# Altium PCB PCBv2.PcbDoc
Units mm, origin at the board's own origin, x right, y up, seen from the top; angles counter-clockwise.
Board outline 94 x 133.2 mm, 2 copper layers (Top Layer, Bottom Layer); 118 components, 108 nets, 537 pads, 13 vias.
Unrouted connection lines stored in the file: 303.
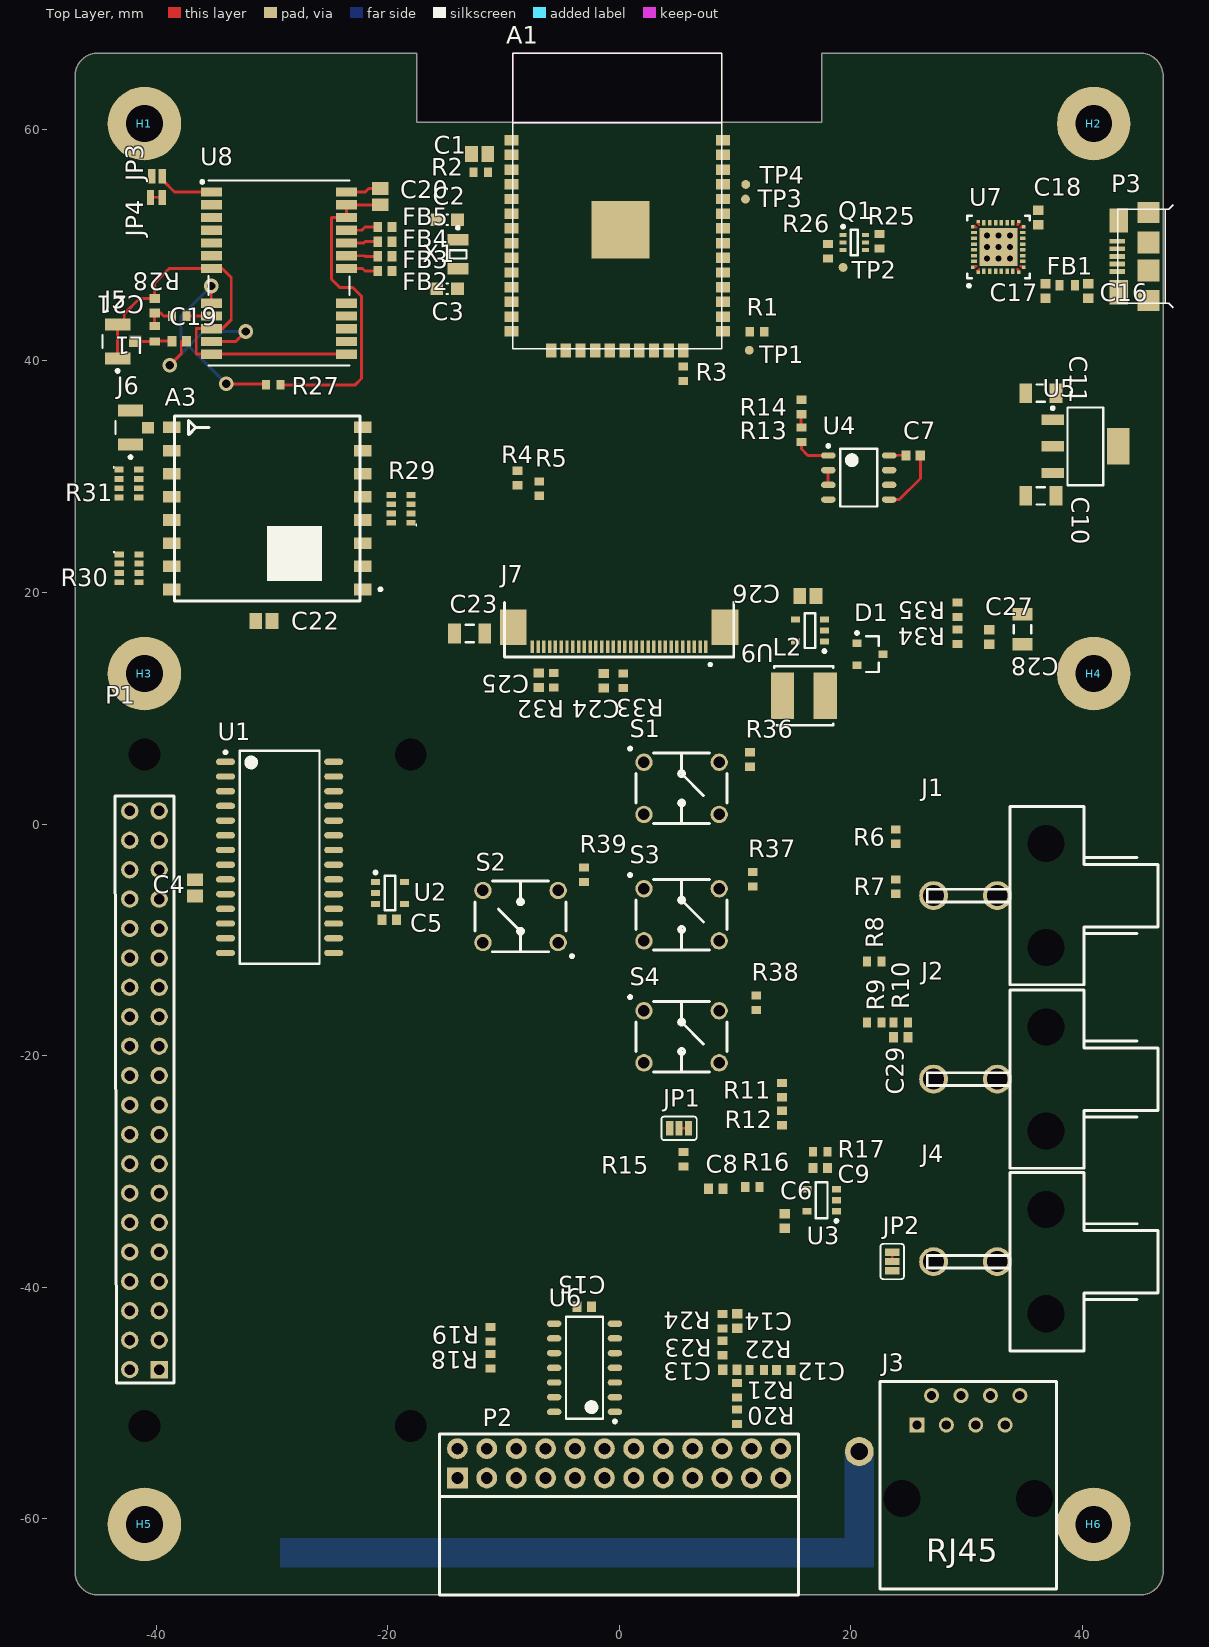
[diagram p0: Top Layer view]
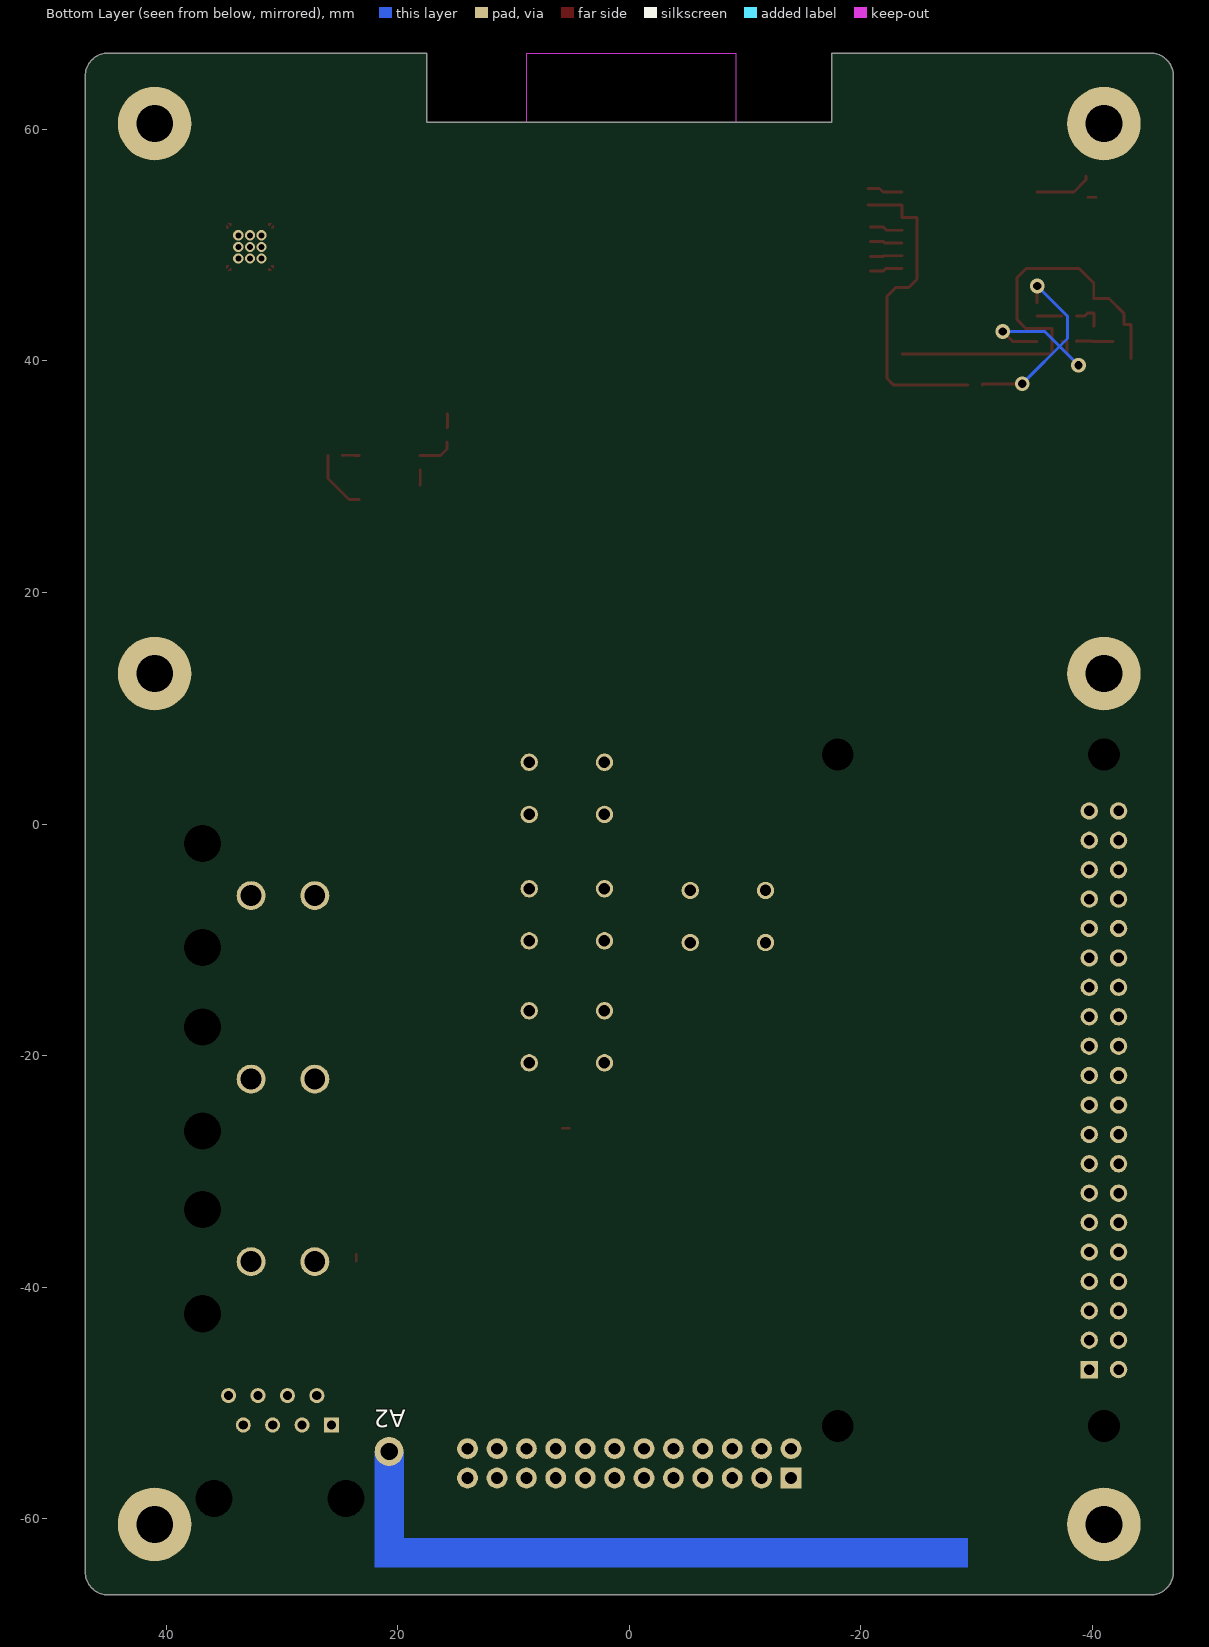
[diagram p1: Bottom Layer view, seen from below]

## Layer stack, top to bottom
Top Solder: solder mask 0.0102, Solder Resist, Dk 3.5
Top Layer: signal copper 0.0356
Dielectric 1: dielectric 0.32, FR-4, Dk 4.8
Bottom Layer: signal copper 0.0356
Bottom Solder: solder mask 0.0102, Solder Resist, Dk 3.5

## Board outline
-17.5,66.6 -17.5,60.6 17.5,60.6 17.5,66.6 45,66.6 cw(c45,64.6) 47,64.6 47,-64.6 cw(c45,-64.6) 45,-66.6 -45,-66.6 cw(c-45,-64.6) -47,-64.6 -47,64.6 cw(c-45,64.6) -45,66.6

## Design rules (kind name [scope] priority, off if disabled: settings)
Clearance [All] p1: gap=0.254 ignorepadtopadclearanceinfootprint=FALSE except(0: Arc-Hole Track-Hole SMDPad-Hole THPad-Hole Via-Hole Fill-Hole Poly-Hole Region-Hole Text-Hole)
ComponentClearance "Ignore Enclosure Part" [InComponent('H1')] p1: gap=0 collisioncheckmode=3 verticalgap=0 showdistances=FALSE
DiffPairsRouting [All] p1: maxlimit=0.254 minlimit=0.254 mostfreqgap=0.254 toplayer_minwidth=0.381 toplayer_maxwidth=0.381 toplayer_prefwidth=0.381 bottomlayer_minwidth=0.381 bottomlayer_maxwidth=0.381 bottomlayer_prefwidth=0.381 maxuncoupledlength=12.7
PolygonConnect [All] p1: connectstyle=Relief reliefconductorwidth=0.254 reliefentries=4 polygonreliefangle="90 Angle" airgapwidth=0.254
RoomDefinition Buttons [InComponentClass('Room Definition 22')] p1: confinementstyle=ConfineIn formatcopy=TRUE lockcomponents=FALSE outline -12.894,-21.909 12.76,-21.909 12.76,7.047 -12.894,7.047
RoomDefinition IOE [InComponentClass('Room Definition 20')] p2: confinementstyle=ConfineIn formatcopy=TRUE lockcomponents=FALSE outline -37.871,-12.634 -17.678,-12.634 -17.678,6.797 -37.871,6.797
RoomDefinition I2CPullup [InComponentClass('Room Definition 18')] p3: confinementstyle=ConfineIn formatcopy=TRUE lockcomponents=FALSE outline -9.7,27.486 -5.89,27.486 -5.89,31.296 -9.7,31.296
RoomDefinition 60HzDetection [InComponentClass('Room Definition 16')] p4: confinementstyle=ConfineIn formatcopy=TRUE lockcomponents=FALSE outline 15.62,-40.736 -12.066,-40.736 -12.066,-52.674 15.62,-52.674
RoomDefinition Leak [InComponentClass('Room Definition 14')] p5: confinementstyle=ConfineIn formatcopy=TRUE lockcomponents=FALSE outline 24.786,-6.788 24.786,0.324 23.008,0.324 23.008,-6.788
RoomDefinition CT [InComponentClass('Room Definition 12')] p6: confinementstyle=ConfineIn formatcopy=TRUE lockcomponents=FALSE outline 25.754,-19.375 25.754,-10.993 20.547,-10.993 20.547,-19.375
RoomDefinition MIC [InComponentClass('Room Definition 10')] p7: confinementstyle=ConfineIn formatcopy=TRUE lockcomponents=FALSE outline 3.28,-39.666 24.997,-39.666 24.997,-21.505 3.28,-21.505
RoomDefinition RS485 [InComponentClass('Room Definition 8')] p8: confinementstyle=ConfineIn formatcopy=TRUE lockcomponents=FALSE outline 14.859,27.043 26.797,27.043 26.797,37.457 14.859,37.457
RoomDefinition OLED [InComponentClass('Room Definition 6')] p9: confinementstyle=ConfineIn formatcopy=TRUE lockcomponents=FALSE outline -15.24,10.16 10.795,10.16 10.795,20.447 -15.24,20.447
RoomDefinition OLEDBoostConverter [InComponentClass('Room Definition 4')] p10: confinementstyle=ConfineIn formatcopy=TRUE lockcomponents=FALSE outline 36.153,8.081 36.153,20.908 12.658,20.908 12.658,8.081
RoomDefinition VREG [InComponentClass('Room Definition 2')] p11: confinementstyle=ConfineIn formatcopy=TRUE lockcomponents=FALSE outline 34.15,27.037 44.564,27.037 44.564,38.594 34.15,38.594
RoomDefinition "UART and Boot" [InComponentClass('UART and Boot')] p12: confinementstyle=ConfineIn formatcopy=TRUE lockcomponents=FALSE outline 17.145,43.942 48.387,43.942 48.387,54.102 17.145,54.102
RoomDefinition LoRa [InComponentClass('LoRa')] p13: confinementstyle=ConfineIn formatcopy=TRUE lockcomponents=FALSE outline -44.022,16.388 -17.098,16.388 -17.098,36.708 -44.022,36.708
RoomDefinition GPS [InComponentClass('GPS')] p14: confinementstyle=ConfineIn formatcopy=TRUE lockcomponents=FALSE outline -45.085,36.957 -18.796,36.957 -18.796,57.023 -45.085,57.023
RoutingVias [All] p1: holewidth=0.711 width=1.27 viastyle="Through Hole" minholewidth=0.711 minwidth=1.27 maxholewidth=0.711 maxwidth=1.27
SolderMaskExpansion [All] p1: expansion=0.102
Width Antenna [InNetClass('RF')] p1: maxlimit=0.254 minlimit=0.254 preferedwidth=0.254 impedancedriven=TRUE minimp=50.000000 maximp=50.000000 favimp=50.000000
Width [All] p2: maxlimit=0.254 minlimit=0.254 preferedwidth=0.254
28 further rules are at their usual default settings.

## Classes and differential pairs
component class "UART and Boot": C16 C17 C18 FB1 P3 Q1 Q? R25 R26 U7
component class Power: C10 C11 C12 C13 C14 C15 R18 R19 R20 R21 R22 R23 R24 U5 U6 U?
component class Main: A1 A2 C1 C2 C3 C4 C5 P1 R1 R2 R3 R4 R5 TP1 TP2 TP3 TP4 U1 U2 X1
component class GPS: C19 C20 C21 FB2 FB3 FB4 FB5 FB? J5 JP3 JP4 JP? L1 R27 R28 U8
component class Accessories: C6 C7 C8 C9 C29 J1 J2 J3 J4 JP1 JP2 P2 R6 R7 R8 R9 R10 R11 R12 R13 R14 R15 R16 R17 U3 U4
component class LoRa: A3 C22 J6 R29 R30 R31
component class UI: C23 C24 C25 C26 C27 C28 D1 J7 L2 R32 R33 R34 R35 R36 R37 R38 R39 S1 S2 S3 S4 U9
net class BTN[1..4]: BTN1 BTN2 BTN3 BTN4
net class DIO[0..5]: DIO0 DIO1 DIO2 DIO3 DIO4 DIO5
net class GPIO[1..8]: GPIO1 GPIO2 GPIO3 GPIO4 GPIO5 GPIO6 GPIO7 GPIO8
net class RF50: NetA3_9 NetC19_2
component class Mechanical: H1 H2 H3 H4 H5 H6
component class "Room Definition 2": C10 C11 U5
component class "Room Definition 4": C26 C27 C28 D1 L2 R34 R35 U9
component class "Room Definition 6": C23 C24 C25 J7 R32 R33
component class "Room Definition 8": C7 R13 R14 U4
component class "Room Definition 10": C6 C8 C9 JP1 JP2 R11 R12 R15 R16 R17 U3
component class "Room Definition 12": C29 R8 R9 R10
component class "Room Definition 14": R6 R7
component class "Room Definition 16": C12 C13 C14 C15 R18 R19 R20 R21 R22 R23 R24 U6
component class "Room Definition 18": R4 R5
component class "Room Definition 20": C4 C5 U1 U2
component class "Room Definition 22": R36 R37 R38 R39 S1 S2 S3 S4
differential pair USB_D: +USB_D_P -USB_D_N

## Components (designator, comment, footprint, x,y, rotation, side; value= is the part's Value field where it differs from the comment)
A1 "ESP-WROOM-32" ESP-WROOM-32 -9.176,41.036 r0 top locked
A2 "60Hz Pickup" 60HzPickup 20.746,-54.21 r270 bottom
A3 "HopeRF RFM95" RFM95/9697/98W -30.396,27.259 r180 top
C1 "22uF" "CAPC2013X14L - CAP0805 1.45mm Tall" -12.051,57.873 r0 top
C2 "CAP 12pF 16V 0603(1608)" CAPC0603(1608)100_M -14.855,52.197 r0 top value=12pF
C3 "CAP 12pF 16V 0603(1608)" CAPC0603(1608)100_M -14.855,46.238 r0 top value=12pF
C4 "10uF" "CAPC2013X14L - CAP0805 1.45mm Tall" -36.63,-5.51 r90 top
C5 "10000pF" "CAPC1608X09L - CAP0603" -19.848,-8.255 r0 top
C6 "10000pF" "CAPC1608X09L - CAP0603" 14.322,-34.286 r90 top
C7 "4.7uF" "CAPC1608X09L - CAP0603" 25.399,31.833 r180 top
C8 "4.7uF" "CAPC1608X09L - CAP0603" 8.353,-31.492 r0 top
C9 "100pF" "CAPC1608X09L - CAP0603" 17.37,-29.714 r0 top
C10 "4.7uF" "CAPC3216X18L - CAP1206 1.8MM TALL" 36.431,28.346 r0 top
C11 "4.7uF" "CAPC3216X18L - CAP1206 1.8MM TALL" 36.431,37.219 r180 top
C12 "10uF" "CAPC1608X09L - CAP0603" 14.216,-47.162 r0 top
C13 "1uF" "CAPC1608X09L - CAP0603" 9.569,-47.151 r0 top
C14 "1uF" "CAPC1608X09L - CAP0603" 10.205,-42.923 r270 top
C15 "10000pF" "CAPC1608X09L - CAP0603" -3.014,-41.709 r0 top
C16 "100pF" "CAPC1608X09L - CAP0603" 40.515,46.036 r90 top
C17 "100pF" "CAPC1608X09L - CAP0603" 36.832,46.036 r90 top
C18 "100pF" "CAPC1608X09L - CAP0603" 36.197,52.386 r270 top
C19 "47pF" "CAPC1608X09L - CAP0603" -38.001,41.688 r180 top
C20 "10uF" "CAPC2013X14L - CAP0805 1.45mm Tall" -20.635,54.188 r270 top
C21 "10000pF" "CAPC1608X09L - CAP0603" -40.119,44.763 r270 top
C22 "10uF" "CAPC2013X14L - CAP0805 1.45mm Tall" -30.692,17.526 r180 top
C23 "10uF" "CAPC3216X18L - CAP1206 1.8MM TALL" -12.911,16.458 r180 top
C24 "1uF" "CAPC1608X09L - CAP0603" -1.328,12.377 r270 top
C25 "2.2uF" "CAPC1608X09L - CAP0603" -6.924,12.41 r90 top
C26 "10uF" "CAPC2013X14L - CAP0805 1.45mm Tall" 16.308,19.696 r180 top
C27 "0.1uF" "CAPC1608X09L - CAP0603" 31.981,16.152 r270 top
C28 "10uF" "CAPC3216X18L - CAP1206 1.8MM TALL" 34.846,16.826 r270 top
C29 "10uF" "CAPC1608X09L - CAP0603" 24.335,-18.42 r180 top
D1 "BAT54 Schottky Diode" "SOT95P240X120-3L - ON Semi" 21.676,14.678 r0 top
FB1 "Feritte Bead 62Ohm" "INDC1608X10L - FL0603" 38.712,46.544 r180 top
FB2 "Feritte Bead 1kOhm" FB1608X09L -20.232,47.779 r180 top
FB3 "Feritte Bead 1kOhm" FB1608X09L -20.232,49.04 r180 top
FB4 "Feritte Bead 1kOhm" FB1608X09L -20.232,50.3 r180 top
FB5 "Feritte Bead 1kOhm" FB1608X09L -20.232,51.565 r180 top
H1 "1/8in Hole by 1/4in Ring Fastener" "1/8in Fastener Hole" -41,60.5 r0 top locked
H2 "1/8in Hole by 1/4in Ring Fastener" "1/8in Fastener Hole" 41,60.5 r0 top locked
H3 "1/8in Hole by 1/4in Ring Fastener" "1/8in Fastener Hole" -41,13 r0 top locked
H4 "1/8in Hole by 1/4in Ring Fastener" "1/8in Fastener Hole" 41,13 r0 top locked
H5 "1/8in Hole by 1/4in Ring Fastener" "1/8in Fastener Hole" -41,-60.5 r0 top locked
H6 "1/8in Hole by 1/4in Ring Fastener" "1/8in Fastener Hole" 41,-60.5 r0 top locked
J1 "4.2mm Pitch 2 Position Connector" "2POS 4.2MM PITCH RIGHT ANGLE" 32.668,-6.188 r90 top
J2 "4.2mm Pitch 2 Position Connector" "2POS 4.2MM PITCH RIGHT ANGLE" 32.668,-22.037 r90 top
J3 "RJ45 Connector" "RJ45 Unshielded PTH Connector" 30.17,-58.267 r0 top
J4 "4.2mm Pitch 2 Position Connector" "2POS 4.2MM PITCH RIGHT ANGLE" 32.668,-37.807 r90 top
J5 "U.FL-R-SMT(10)" HRS-U.FL-R-SMT_V -43.32,41.688 r90 top
J6 "U.FL-R-SMT(10)" HRS-U.FL-R-SMT_V -42.207,34.244 r90 top
J7 "31Pos FlatFlex Connector" "31 POSITION FLAT FLEX ZIF CONNECTOR" 0,17 r180 top locked
JP1 "JUMPER-PAD-3-2OF3_NC_BY_TRACE_SMALL" PAD-JUMPER-3-2OF3_NC_BY_TRACE_YES_SILK_FULL_BOX 5.178,-26.285 r0 top
JP2 "JUMPER-PAD-3-2OF3_NC_BY_TRACE_SMALL" PAD-JUMPER-3-2OF3_NC_BY_TRACE_YES_SILK_FULL_BOX 23.593,-37.792 r90 top
JP3 "JUMPER-PAD-2-NO" PAD-JUMPER-2-NO_NO_SILK -39.912,55.964 r0 top
JP4 "JUMPER-PAD-2-NC_BY_TRACENO_SILK" PAD-JUMPER-2-NC_BY_TRACE_NO_SILK -39.97,54.125 r0 top
L1 "27nH" "INDC1608X09L - IND0603 0.95MM TALL" -40.117,42.353 r270 top
L2 "10uH" INDP4949X20L 15.955,11.078 r0 top
P1 "Raspbery Pi Zero Mate" "Raspberry Pi Zero" -41,-23 r0 top locked
P2 "0.1\" Pitch, 2 Row, 24 Pos, Female, Right-Angle" "0.1 INCH 2 ROW 24 POS FEMALE RIGHT-ANGLE HEADER SULLINS" 0,-55.23 r0 top locked
P3 "USB?" MicroUSB_TypeB 45.722,45.227 r90 top
Q1 "Dual 3904 NPN" SOT65P210X110-6L 20.322,50.227 r0 top
R1 "10K" "RESC1608X06L - RES0603" 11.91,42.519 r0 top
R2 "10K" "RESC1608X06L - RES0603" -11.945,56.297 r180 top
R3 "10K" "RESC1608X06L - RES0603" 5.546,38.89 r90 top
R4 "4.7K" "RESC1608X06L - RES0603" -8.782,29.891 r90 top
R5 "4.7K" "RESC1608X06L - RES0603" -6.893,28.978 r90 top
R6 "10" "RESC1608X06L - RES0603" 23.904,-1.085 r90 top
R7 "3M" "RESC1608X06L - RES0603" 23.904,-5.403 r90 top
R8 "33" "RESC1608X06L - RES0603" 22.036,-11.872 r180 top
R9 "1K" "RESC1608X06L - RES0603" 22.036,-17.141 r180 top
R10 "1K" "RESC1608X06L - RES0603" 24.322,-17.141 r180 top
R11 "10K" "RESC1608X06L - RES0603" 14.068,-22.983 r90 top
R12 "10K" "RESC1608X06L - RES0603" 14.068,-25.396 r90 top
R13 "2.43K" "RESC1608X06L - RES0603" 15.747,33.611 r270 top
R14 "4.32K" "RESC1608X06L - RES0603" 15.747,36.024 r270 top
R15 "2.2K" "RESC1608X06L - RES0603" 5.559,-28.952 r90 top
R16 "1.5k" "RESC1608X06L - RES0603" 11.518,-31.365 r180 top
R17 "100K" "RESC1608X06L - RES0603" 17.37,-28.317 r0 top
R18 "100K" "RESC1608X06L - RES0603" -11.117,-46.411 r270 top
R19 "100K" "RESC1608X06L - RES0603" -11.104,-44.065 r270 top
R20 "43" "RESC1608X06L - RES0603" 10.191,-51.209 r90 top
R21 "91" "RESC1608X06L - RES0603" 10.19,-48.927 r270 top
R22 "13.3K" "RESC1608X06L - RES0603" 11.899,-47.154 r180 top
R23 "28K" "RESC1608X06L - RES0603" 8.925,-45.263 r270 top
R24 "28K" "RESC1608X06L - RES0603" 8.927,-42.949 r270 top
R25 "12K" "RESC1608X06L - RES0603" 22.481,50.354 r90 top
R26 "12K" "RESC1608X06L - RES0603" 18.036,49.475 r270 top
R27 "1K" "RESC1608X06L - RES0603" -29.887,37.94 r0 top
R28 "10" "RESC1608X06L - RES0603" -38.001,43.888 r180 top
R29 "100" CAC-80P319X159-8L -18.825,27.218 r180 top
R30 "100" CAC-80P319X159-8L -42.319,22.09 r0 top
R31 "100" CAC-80P319X159-8L -42.343,29.411 r0 top
R32 "910K" "RESC1608X06L - RES0603" -5.645,12.408 r270 top
R33 "4.7K" "RESC1608X06L - RES0603" 0.354,12.382 r270 top
R34 "205K" "RESC1608X06L - RES0603" 29.231,16.166 r270 top
R35 "23.2K" "RESC1608X06L - RES0603" 29.23,18.492 r270 top
R36 "10K" "RESC1608X06L - RES0603" 11.322,5.569 r90 top
R37 "10K" "RESC1608X06L - RES0603" 11.54,-4.763 r90 top
R38 "10K" "RESC1608X06L - RES0603" 11.845,-15.445 r90 top
R39 "10K" "RESC1608X06L - RES0603" -3.022,-4.371 r90 top
S1 "17mm Tactile Switch" TactileSwitchTE17mm 5.396,3.081 r0 top
S2 "17mm Tactile Switch" TactileSwitchTE17mm -8.515,-7.99 r180 top
S3 "17mm Tactile Switch" TactileSwitchTE17mm 5.396,-7.841 r0 top
S4 "17mm Tactile Switch" TactileSwitchTE17mm 5.396,-18.382 r0 top
TP1 "Test Point" TestPoint1 11.239,40.926 r90 top
TP2 "Test Point" TestPoint1 19.347,48.077 r90 top
TP3 "Test Point" TestPoint1 10.916,53.979 r90 top
TP4 "Test Point" TestPoint1 10.937,55.247 r90 top
U1 "I2C 16CH IO Expander" SOIC127P1030X265-28L -29.328,-2.883 r0 top
U2 "Single OR Gate" SOT95P280X140-5L -19.793,-5.962 r0 top
U3 "88MHz Single OP-Amp" SOT95P280X145-5L 17.497,-32.508 r180 top
U4 "TI SN65176B" SOIC127P600X175-8L 20.7,29.928 r0 top
U5 "AP2114H-3.3TRG1" SOT230P700X180-4L 40.281,32.622 r0 top
U6 "1MHz Quad OP-Amp" SOIC127P600X175-14L -2.986,-46.974 r180 top
U7 "FT232RQ-Reel" PQFN5X5-32_V_FTDI_BIG_VIAS 32.768,49.846 r90 top
U8 "NEO-M8T" NEO -29.382,47.588 r180 top value=NEO-M8
U9 "FAN5331 Boost Converter" "SOT95P280X145-5L - ON Semi" 16.487,16.711 r180 top
X1 "14340272-32.768KHz" ITTI-14340272-32.768KHz-2_V -13.929,49.201 r270 top

## Footprints (in the part's own frame and the unit in brackets; to place one, negate y for a bottom-side part, rotate by r counter-clockwise, add the part's x,y. Pads: shape width x height; smd on the part's side, far side on the other; paste and mask are expansions set on the pad)
"0.1 INCH 2 ROW 24 POS FEMALE RIGHT-ANGLE HEADER SULLINS" [mm] "Sullins 0.1\" Dual row 24 position female right-angle header"
  rect 1.8x1.8 hole 1.02 unplated: 1(-13.97,-1.27)
  round 1.8 hole 1.02 unplated: 2(-13.97,1.27) 3(-11.43,-1.27) 4(-11.43,1.27) 5(-8.89,-1.27) 6(-8.89,1.27) 7(-6.35,-1.27) 8(-6.35,1.27) 9(-3.81,-1.27) 10(-3.81,1.27) 11(-1.27,-1.27) 12(-1.27,1.27) 13(1.27,-1.27) 14(1.27,1.27) 15(3.81,-1.27) 16(3.81,1.27) 17(6.35,-1.27) 18(6.35,1.27) 19(8.89,-1.27) 20(8.89,1.27) 21(11.43,-1.27) 22(11.43,1.27) 23(13.97,-1.27) 24(13.97,1.27)
  silkscreen extent -15.5,-11.37 15.5,2.54, body extent -15.49,-11.34 15.49,1.5, height 5.08
"1/8in Fastener Hole" [mm]
  round 6.35 hole 3.175: 1(0,0)
"2POS 4.2MM PITCH RIGHT ANGLE" [mm] "2position 4.2mm picth right angle with screw support (TE 1586043-2)"
  round 0 hole 3.2 unplated: 0(-4.5,-4.2) 0(4.5,-4.2)
  round 2.5 hole 1.8: 1(0,0) 2(0,5.5)
  silkscreen extent -7.7,-13.9 7.7,6.05, body extent -7.7,-13.9 7.7,6.06, height 10.9
"31 POSITION FLAT FLEX ZIF CONNECTOR" [mm] "TE 3-1734839-1 31 Position Flat Flex ZIF Connector"
  rect 2.3x3.1 smd: 0(-9.15,0) 0(9.15,0)
  rect 0.3x1.1 smd mask+0.02: 1(-7.5,1.7) 2(-7,1.7) 3(-6.5,1.7) 4(-6,1.7) 5(-5.5,1.7) 6(-5,1.7) 7(-4.5,1.7) 8(-4,1.7) 9(-3.5,1.7) 10(-3,1.7) 11(-2.5,1.7) 12(-2,1.7) 13(-1.5,1.7) 14(-1,1.7) 15(-0.5,1.7) 16(0,1.7) 17(0.5,1.7) 18(1,1.7) 19(1.5,1.7) 20(2,1.7) 21(2.5,1.7) 22(3,1.7) 23(3.5,1.7) 24(4,1.7) 25(4.5,1.7) 26(5,1.7) 27(5.5,1.7) 28(6,1.7) 29(6.5,1.7) 30(7,1.7) 31(7.5,1.7)
  silkscreen extent -9.91,-2.15 9.91,3.33, body extent -10.47,-3.07 10.46,2.04, height 2
60HzPickup [mm] "This is a small straight trace antenna with an avaliable via for external pickup"
  round 2.5 hole 1.5 paste-10: 1(0,0)
  Top Layer region: 0,1.25 0,-1.25 10,-1.25 10,50 7.5,50 7.5,1.25
CAC-80P319X159-8L [mm] "Chip Array, ConvexE, 8-Leads, Pitch 0.80mm,  Body 3.20x1.60mm,  IPC High Density"
  rect 0.8x0.5 smd: 1(-0.85,1.2) 2(-0.85,0.4) 3(-0.85,-0.4) 4(-0.85,-1.2) 5(0.85,-1.2) 6(0.85,-0.4) 7(0.85,0.4) 8(0.85,1.2)
  silkscreen extent -1.36,1.34 -1.26,1.44, body extent -0.92,-1.68 0.92,1.68, height 0.7
CAPC0603(1608)100_M [mm] "Chip Capacitor, Body 1.6x0.8mm, Height 1.0mm, IPC Low Density"
  rect 1.1x1.1 smd: 1(-0.9,0) 2(0.9,0)
  silkscreen extent -0.05,-0.45 0.05,0.45, body extent -0.87,-0.47 0.88,0.48, height 1
"CAPC1608X09L - CAP0603" [mm] "Chip Capacitor, 2-Leads, Body 1.60x0.80mm, IPC High Density"
  rect 0.8x0.9 smd: 1(-0.625,0) 2(0.625,0)
  body extent -0.87,-0.48 0.87,0.48, height 0.9
"CAPC2013X14L - CAP0805 1.45mm Tall" [mm] "Chip Capacitor, 2-Leads, Body 2.00x1.30mm, IPC High Density"
  rect 1.1x1.4 smd: 1(-0.7,0) 2(0.7,0)
  body extent -1.1,-0.72 1.1,0.73, height 1.45
"CAPC3216X18L - CAP1206 1.8MM TALL" [mm] "Chip Capacitor, 2-Leads, Body 3.20x1.60mm, IPC High Density"
  rect 1.1x1.7 smd: 1(-1.3,0) 2(1.3,0)
  silkscreen extent -0.35,-0.75 0.35,0.75, body extent -1.7,-0.9 1.7,0.9, height 1.8
ESP-WROOM-32 [mm] "ESP WROOM 32 Module"
  rect 5x5 smd: 0(9.3,10.3)
  rect 1.2x0.9 smd: 1(-0.127,18.034) 2(-0.127,16.764) 3(-0.127,15.494) 4(-0.127,14.224) 5(-0.127,12.954) 6(-0.127,11.684) 7(-0.127,10.414) 8(-0.127,9.144) 9(-0.127,7.874) 10(-0.127,6.604) 11(-0.127,5.334) 12(-0.127,4.064) 13(-0.127,2.794) 14(-0.127,1.524) 25(18.161,1.524) 26(18.161,2.794) 27(18.161,4.064) 28(18.161,5.334) 29(18.161,6.604) 30(18.161,7.874) 31(18.161,9.144) 32(18.161,10.414) 33(18.161,11.684) 34(18.161,12.954) 35(18.161,14.224) 36(18.161,15.494) 37(18.161,16.764) 38(18.161,18.034)
  rect 0.9x1.2 smd: 15(3.302,-0.127) 16(4.57,-0.127) 17(5.84,-0.127) 18(7.11,-0.127) 19(8.38,-0.127) 20(9.65,-0.127) 21(10.92,-0.127) 22(12.19,-0.127) 23(13.46,-0.127) 24(14.73,-0.127)
  Keep-Out Layer region: 0,19.558 18.034,19.558 18.034,25.527 0,25.527
  silkscreen extent 0,0 18.03,25.53, body extent 0,0 18.03,25.53, height 2
FB1608X09L [mm] "Chip Ferrite Bead, 2-Leads, Body 1.60x0.80mm, IPC High Density"
  rect 0.77x0.88 smd: 1(-0.615,0) 2(0.615,0)
  body extent -0.87,-0.48 0.87,0.48, height 0.95
HRS-U.FL-R-SMT_V [mm] "SMD, 3-Leads, Body 2.6x2.6mm"
  rect 1.05x2.2 smd: 1(-1.475,0) 2(1.475,0)
  rect 1x1.05 smd: 3(0,-1.525)
  silkscreen extent -2.67,-0.13 0.55,1.3, body extent -1.3,-1.3 1.3,1.3, height 1.25
"INDC1608X09L - IND0603 0.95MM TALL" [mm] "Chip Inductor, 2-Leads, Body 1.60x0.80mm, IPC High Density"
  rect 0.67x0.88 smd: 1(-0.665,0) 2(0.665,0)
  body extent -0.87,-0.48 0.87,0.48, height 0.95
"INDC1608X10L - FL0603" [mm] "Chip Inductor, 2-Leads, Body 1.60x0.80mm, IPC High Density"
  rect 0.68x0.92 smd: 1(-0.66,0) 2(0.66,0)
  body extent -0.9,-0.5 0.9,0.5, height 1
INDP4949X20L [mm] "Precision Wire Wound Inductor, 2-Leads, Body 4.90x4.90mm, IPC High Density"
  rect 2x4 smd: 1(-1.85,0) 2(1.85,0)
  silkscreen extent -2.55,-2.55 2.55,2.55, body extent -2.55,-2.45 2.55,2.45, height 2.1
ITTI-14340272-32.768KHz-2_V [mm] "Hand Drawn, 2-Leads, Body 3.2x1.5mm, Pitch 2.5mm"
  rect 1x1.8 smd: 1(-1.25,0) 2(1.25,0)
  silkscreen extent -2.43,-0.75 0.35,0.75, body extent -1.6,-0.75 1.6,0.75, height 0.9
MicroUSB_TypeB [mm]
  rect 1.8x1.9 smd: 0(0,0) 0(7.6,0)
  rect 2.1x1.6 smd: 0(0.7,2.55) 0(6.9,2.55)
  rect 1.9x1.9 smd: 0(2.6,0) 0(5,0)
  rect 0.4x1.35 smd: 1(2.5,2.675) 2(3.15,2.675) 3(3.8,2.675) 4(4.45,2.675) 5(5.1,2.675)
  silkscreen extent -0.63,-2.16 8.26,2.67, body extent -0.18,-2.4 7.8,3.03, height 2.72
NEO [mm] "u-blox NEO GNSS module"
  rect 1.8x0.8 smd paste-0.1: 1(5.842,-7) 2(5.842,-5.9) 3(5.842,-4.8) 4(5.842,-3.7) 5(5.842,-2.6) 6(5.842,-1.5) 7(5.842,-0.4) 8(5.842,2.6) 9(5.842,3.7) 10(5.842,4.8) 11(5.842,5.9) 12(5.842,7) 13(-5.842,7) 14(-5.842,5.9) 15(-5.842,4.8) 16(-5.842,3.7) 17(-5.842,2.6) 18(-5.842,-0.4) 19(-5.842,-1.5) 20(-5.842,-2.6) 21(-5.842,-3.7) 22(-5.842,-4.8) 23(-5.842,-5.9) 24(-5.842,-7)
  silkscreen extent -6.11,-8 6.69,8, body extent -6.1,-8 6.1,8, height 2.28
PAD-JUMPER-2-NC_BY_TRACE_NO_SILK [mil]
  rect 25x50 smd: 1(-20,0) 2(20,0)
  Top Layer lines w8: -15,0 15,0
PAD-JUMPER-2-NO_NO_SILK [mm]
  rect 0.635x1.27 smd: 1(-0.45,0) 2(0.45,0)
PAD-JUMPER-3-2OF3_NC_BY_TRACE_YES_SILK_FULL_BOX [mil]
  rect 25x50 smd: 1(-32,0) 2(0,0) 3(32,0)
  Top Layer lines w8: 0,0 25,0
  silkscreen extent -60,-40 60,40
PQFN5X5-32_V_FTDI_BIG_VIAS [mm] "QFN, 32-Leads, Body 5x5mm, Pitch 0.5mm, Thermal Pad 3.3x3.3mm, FTDI Recommended"
  rect 0.3x0.3 smd paste-0.15 mask-0.15: 1(-2.2,1.75) 8(-2.2,-1.75) 9(-1.75,-2.2) 16(1.75,-2.2) 17(2.2,-1.75) 24(2.2,1.75) 25(1.75,2.2) 32(-1.75,2.2)
  rect 0.5x0.3 smd paste-0.15 mask+0.06: 2(-2.1,1.25) 3(-2.1,0.75) 4(-2.1,0.25) 5(-2.1,-0.25) 6(-2.1,-0.75) 7(-2.1,-1.25) 18(2.1,-1.25) 19(2.1,-0.75) 20(2.1,-0.25) 21(2.1,0.25) 22(2.1,0.75) 23(2.1,1.25)
  rect 0.3x0.5 smd paste-0.15 mask+0.06: 10(-1.25,-2.1) 11(-0.75,-2.1) 12(-0.25,-2.1) 13(0.25,-2.1) 14(0.75,-2.1) 15(1.25,-2.1) 26(1.25,2.1) 27(0.75,2.1) 28(0.25,2.1) 29(-0.25,2.1) 30(-0.75,2.1) 31(-1.25,2.1)
  rect 3.3x3.3 smd paste-1.65 mask+0.06: 33(0,0)
  Top Layer region: -2.05,-1.6 -1.85,-1.6 -1.85,-1.7 -2.05,-1.9
  Top Layer region: 2.05,-1.6 1.85,-1.6 1.85,-1.7 2.05,-1.9
  Top Layer region: 2.05,1.6 1.85,1.6 1.85,1.7 2.05,1.9
  Top Layer region: -2.05,1.6 -1.85,1.6 -1.85,1.7 -2.05,1.9
  Top Layer region: -1.6,-2.05 -1.6,-1.85 -1.7,-1.85 -1.9,-2.05
  Top Layer region: 1.6,2.05 1.6,1.85 1.7,1.85 1.9,2.05
  Top Layer region: -1.6,2.05 -1.6,1.85 -1.7,1.85 -1.9,2.05
  Top Layer region: 1.6,-1.85 1.6,-2.05 1.9,-2.05 1.7,-1.85
  silkscreen extent -3.47,-2.7 2.7,2.7, body extent -2.55,-2.55 2.55,2.55, height 1
"Raspberry Pi Zero" [mm] "Raspberry Pi Zero Header and Layout"
  round 0 hole 2.75 unplated mask+2: 0(0,-29) 0(0,29) 0(23,-29) 0(23,29)
  rect 1.5x1.5 hole 0.9: 1(1.27,-24.13)
  round 1.5 hole 0.9: 2(-1.27,-24.13) 3(1.27,-21.59) 4(-1.27,-21.59) 5(1.27,-19.05) 6(-1.27,-19.05) 7(1.27,-16.51) 8(-1.27,-16.51) 9(1.27,-13.97) 10(-1.27,-13.97) 11(1.27,-11.43) 12(-1.27,-11.43) 13(1.27,-8.89) 14(-1.27,-8.89) 15(1.27,-6.35) 16(-1.27,-6.35) 17(1.27,-3.81) 18(-1.27,-3.81) 19(1.27,-1.27) 20(-1.27,-1.27) 21(1.27,1.27) 22(-1.27,1.27) 23(1.27,3.81) 24(-1.27,3.81) 25(1.27,6.35) 26(-1.27,6.35) 27(1.27,8.89) 28(-1.27,8.89) 29(1.27,11.43) 30(-1.27,11.43) 31(1.27,13.97) 32(-1.27,13.97) 33(1.27,16.51) 34(-1.27,16.51) 35(1.27,19.05) 36(-1.27,19.05) 37(1.27,21.59) 38(-1.27,21.59) 39(1.27,24.13) 40(-1.27,24.13)
  silkscreen extent -2.54,-25.27 2.54,25.4
"RESC1608X06L - RES0603" [mm] "Chip Resistor, 2-Leads, Body 1.60x0.80mm, IPC High Density"
  rect 0.7x0.85 smd: 1(-0.625,0) 2(0.625,0)
  body extent -0.87,-0.48 0.87,0.48, height 0.55
RFM95/9697/98W [mm] "HopeRF RFM95 RFM96 RFM97 RFM98"
  rect 1.5x1 smd: 1(-8.25,7) 2(-8.25,5) 3(-8.25,3) 4(-8.25,1) 5(-8.25,-1) 6(-8.25,-3) 7(-8.25,-5) 8(-8.25,-7) 9(8.25,-7) 10(8.25,-5) 11(8.25,-3) 12(8.25,-1) 13(8.25,1) 14(8.25,3) 15(8.25,5) 16(8.25,7)
  silkscreen extent -9.9,-8 8,8, body extent -8,-8 8,8, height 1.8
"RJ45 Unshielded PTH Connector" [mm] "Amphenol 54601-908WPLF Unshielded RJ45 PTH Connector"
  round 0 hole 3.2 unplated: 0(-5.716,0) 0(5.716,0)
  rect 1.3x1.3 hole 0.8: 1(-4.444,6.35)
  round 1.3 hole 0.8: 2(-3.174,8.89) 3(-1.904,6.35) 4(-0.634,8.89) 5(0.636,6.35) 6(1.906,8.89) 7(3.176,6.35) 8(4.446,8.89)
  silkscreen extent -7.62,-7.8 7.62,10.12, body extent -7.62,-7.8 7.62,10.2, height 11.5
SOIC127P600X175-8L [mm] "SOIC, 8-Leads, Body 4.90x3.90mm, Pitch 1.27mm, IPC High Density"
  oval 1.25x0.55 smd: 1(-2.625,1.905) 2(-2.625,0.635) 3(-2.625,-0.635) 4(-2.625,-1.905) 5(2.625,-1.905) 6(2.625,-0.635) 7(2.625,0.635) 8(2.625,1.905)
  silkscreen extent -2.75,-2.5 1.6,2.85, body extent -3,-2.5 3,2.5, height 1.75
SOIC127P600X175-14L [mm] "SOIC, 14-Leads, Body 8.65x3.90mm, Pitch 1.27mm, IPC High Density"
  oval 1.25x0.55 smd: 1(-2.625,3.81) 2(-2.625,2.54) 3(-2.625,1.27) 4(-2.625,0) 5(-2.625,-1.27) 6(-2.625,-2.54) 7(-2.625,-3.81) 8(2.625,-3.81) 9(2.625,-2.54) 10(2.625,-1.27) 11(2.625,0) 12(2.625,1.27) 13(2.625,2.54) 14(2.625,3.81)
  silkscreen extent -2.75,-4.4 1.6,4.76, body extent -3,-4.4 3,4.4, height 1.75
SOIC127P1030X265-28L [mm] "SOIC, 28-Leads, Body 17.90x7.50mm, Pitch 1.27mm, IPC High Density"
  oval 1.65x0.55 smd: 1(-4.675,8.255) 2(-4.675,6.985) 3(-4.675,5.715) 4(-4.675,4.445) 5(-4.675,3.175) 6(-4.675,1.905) 7(-4.675,0.635) 8(-4.675,-0.635) 9(-4.675,-1.905) 10(-4.675,-3.175) 11(-4.675,-4.445) 12(-4.675,-5.715) 13(-4.675,-6.985) 14(-4.675,-8.255) 15(4.675,-8.255) 16(4.675,-6.985) 17(4.675,-5.715) 18(4.675,-4.445) 19(4.675,-3.175) 20(4.675,-1.905) 21(4.675,-0.635) 22(4.675,0.635) 23(4.675,1.905) 24(4.675,3.175) 25(4.675,4.445) 26(4.675,5.715) 27(4.675,6.985) 28(4.675,8.255)
  silkscreen extent -4.8,-9.2 3.45,9.2, body extent -5.15,-9.2 5.15,9.2, height 2.65
SOT65P210X110-6L [mm] "SOT23, 6-Leads, Body 2.00x2.10mm, Pitch 0.65mm, IPC High Density"
  rect 0.6x0.35 smd: 1(-0.975,0.65) 2(-0.975,0) 3(-0.975,-0.65) 4(0.975,-0.65) 5(0.975,0) 6(0.975,0.65)
  silkscreen extent -1.1,-1.1 0.3,1.5, body extent -0.67,-1.1 0.67,1.1, height 1.1
"SOT95P240X120-3L - ON Semi" [mm] "SOT23, 3-Leads, Body 2.92x2.40mm, Pitch 0.95mm, IPC High Density"
  rect 0.75x0.65 smd: 1(-1.125,0.95) 2(-1.125,-0.95) 3(1.125,0)
  silkscreen extent -1.25,-1.55 0.75,1.95, body extent -1.35,-1.56 1.35,1.56, height 1.2
SOT95P280X140-5L [mm] "SOT23, 5-Leads, Body 2.90x2.80mm, Pitch 0.95mm, IPC High Density"
  rect 0.8x0.55 smd: 1(-1.25,0.95) 2(-1.25,0) 3(-1.25,-0.95) 4(1.25,-0.95) 5(1.25,0.95)
  silkscreen extent -1.37,-1.5 0.45,1.9, body extent -1.5,-1.5 1.5,1.5, height 1.4
SOT95P280X145-5L [mm] "SOT23, 5-Leads, Body 2.90x2.80mm, Pitch 0.95mm, IPC High Density"
  rect 0.8x0.55 smd: 1(-1.275,0.95) 2(-1.275,0) 3(-1.275,-0.95) 4(1.275,-0.95) 5(1.275,0.95)
  silkscreen extent -1.4,-1.55 0.5,1.9, body extent -1.5,-1.53 1.5,1.53, height 1.45
"SOT95P280X145-5L - ON Semi" [mm] "SOT23, 5-Leads, Body 2.90x2.80mm, Pitch 0.95mm, IPC High Density"
  rect 0.8x0.55 smd: 1(-1.25,0.95) 2(-1.25,0) 3(-1.25,-0.95) 4(1.25,-0.95) 5(1.25,0.95)
  silkscreen extent -1.38,-1.5 0.45,1.9, body extent -1.5,-1.5 1.5,1.5, height 1.45
SOT230P700X180-4L [mm] "SOT223, 4-Leads, Body 6.50x7.00mm (avg), Pitch 2.30mm, IPC High Density"
  rect 1.95x0.9 smd: 1(-2.825,2.3) 2(-2.825,0) 3(-2.825,-2.3)
  rect 1.95x3.15 smd: 4(2.825,0)
  silkscreen extent -2.95,-3.35 1.55,3.42, body extent -1.85,-3.35 1.85,3.35, height 1.8
TactileSwitchTE17mm [mm] "TE 3-1825910-1 17mm Tactile Switch"
  round 1.5 hole 0.99: 1(-3.25,2.25) 2(3.25,2.25) 3(-3.25,-2.25) 4(3.25,-2.25)
  silkscreen extent -4.57,-3.05 3.94,3.56, body extent -3.9,-2.99 3.9,3, height 17
TestPoint1 [mil] "Small 0.762mm Round Test Point"
  round 30 smd paste-39.37: 1(0,0)

## Part data
A1: "ESP WROOM 32 Module", Supplier Part Number 1=1528-1801-ND, Supplier 1=Digi-Key
A2: library part "60Hz pickup with via", "5cm 60Hz pickup antenna with via for external wire"
A3: library part RFM95, "HopeRF RFM95 915MHz LoRa Radio", Supplier Part Number 1=1597-1488-ND, Supplier 1=Digi-Key, Supplier 2=Digi-Key, Supplier Part Number 2=RFM95W-915S2-ND
C1: library part "CAP0805 22uF 10% 6.3V X5R", "SMT 0805 Ceramic Capacitor", Supplier Part Number 1=1276-6687-1-ND, TempCoeff=X5R, Tolerance=10%, Voltage=6.3V, Supplier 1=Digi-Key, Supplier 2=Digi-Key, Supplier Part Number 2=311-1860-1-ND
C2 C3: library part CMP-1035-00607-1, "CAP 12pF 16V ±10% 0603 (1608 Metric) Thickness 1mm SMD", Case-EIA=0603, Case-Metric=1608, Rated Voltage="16 V", Tolerance=±10%, Max Thickness="1 mm", Technology=SMT
C4 C20 C22 C26: library part "CAP0805 10uF 10% 6.3V X5R", "SMT 0805 Ceramic Capacitor", Supplier Part Number 1=1276-6457-1-ND, TempCoeff=X5R, Tolerance=10%, Voltage=6.3V, Supplier 1=Digi-Key
C5 C6 C15 C21: library part "CAP0603 10000pF 10% 50V X7R", "SMT 0603 Ceramic Capacitor", Supplier Part Number 1=478-1215-1-ND, TempCoeff=X7R, Tolerance=10%, Voltage=50V, Supplier 1=Digi-Key, Supplier 2=Digi-Key, Supplier 3=Digi-Key, Supplier Part Number 2=311-1080-1-ND, Supplier Part Number 3=490-1494-1-ND
C7 C8: library part "CAP0603 4.7uF 10% 6.3V X7R", "SMT 0603 Ceramic Capacitor", Supplier Part Number 1=1276-2087-1-ND, TempCoeff=X7R, Tolerance=10%, Voltage=6.3V, Supplier 1=Digi-Key
C9 C16 C17 C18: library part "CAP0603 100pF 5% 50V NP0", "SMT 0603 Ceramic Capacitor", Supplier Part Number 1=399-1061-1-ND, TempCoeff=NP0, Tolerance=5%, Voltage=50V, Supplier 1=Digi-Key, Supplier 2=Digi-Key, Supplier Part Number 2=490-1427-1-ND
C10 C11: library part "CAP1206 4.7uF 10% 25V X5R", "SMT 1206 Ceramic Capacitor", Supplier Part Number 1=587-1336-1-ND, TempCoeff=X5R, Tolerance=10%, Voltage=25V, Supplier 1=Digi-Key
C12 C29: library part "CAP0603 10uF 20% 6.3V X5R", "SMT 0603 Ceramic Capacitor", Supplier Part Number 1=587-1256-1-ND, TempCoeff=X5R, Tolerance=20%, Voltage=6.3V, Supplier 1=Digi-Key, Supplier 2=Digi-Key, Supplier Part Number 2=490-3896-1-ND
C13 C14: library part "CAP0603 1uF 10% 10V X7R", "SMT 0603 Ceramic Capacitor", Supplier Part Number 1=1276-1946-1-ND, TempCoeff=X7R, Tolerance=10%, Voltage=10V, Supplier 1=Digi-Key, Supplier 2=Digi-Key, Supplier Part Number 2=399-3118-1-ND
C19: library part "CAP0603 47pF 5% 50V NP0", "SMT 0603 Ceramic Capacitor", Supplier Part Number 1=1276-1037-1-ND, TempCoeff=NP0, Tolerance=5%, Voltage=50V, Supplier 1=Digi-Key, Supplier 2=Digi-Key, Supplier 3=Arrow, Supplier 4=Digi-Key, Supplier Part Number 2=1276-2296-1-ND, Supplier Part Number 3=CFabNzdY6X6BB7Ej2OVMNUmEE8oTDHVGVspzp79aHa0, Supplier Part Number 4=399-1056-1-ND
C23 C28: library part "CAP1206 10uF 10% 16V X5R", "SMT 1206 Ceramic Capacitor", Supplier Part Number 1=1276-1137-1-ND, TempCoeff=X5R, Tolerance=10%, Voltage=16V, Supplier 1=Digi-Key, Supplier 2=Digi-Key, Supplier Part Number 2=490-10526-1-ND
C24: library part "CAP0603 1uF 5% 10V X7R", "SMT 0603 Ceramic Capacitor", Supplier Part Number 1=478-10074-1-ND, TempCoeff=X7R, Tolerance=5%, Voltage=10V, Supplier 1=Digi-Key, Supplier 2=Mouser, Supplier 3=Digi-Key, Supplier Part Number 2=581-0603ZC105JAT2A, Supplier Part Number 3=311-3484-1-ND
C25: library part "CAP0603 2.2uF 10% 6.3V X7R", "SMT 0603 Ceramic Capacitor", Supplier Part Number 1=1276-2017-1-ND, TempCoeff=X7R, Tolerance=10%, Voltage=6.3V, Supplier 1=Digi-Key, Supplier 2=Digi-Key, Supplier Part Number 2=311-1795-1-ND
C27: library part "CAP0603 0.1uF 10% 25V X7R", "SMT 0603 Ceramic Capacitor", Supplier Part Number 1=311-1341-1-ND, TempCoeff=X7R, Tolerance=10%, Voltage=25V, Supplier 1=Digi-Key, Supplier 2=Digi-Key, Supplier Part Number 2=490-1524-1-ND
D1: library part BAT54, "ON Semi BAT54 800mV Schottky Diode", Supplier Part Number 1=BAT54SLT1GOSCT-ND, Supplier 1=Digi-Key, Supplier 2=Mouser, Supplier Part Number 2=512-BAT54, Vf=800mV, Vr=30V
FB1: library part "FB0603 62Ohm", Supplier Part Number 1=732-6702-1-ND, Impedance at 100MHz=62Ohms, Supplier 1=Digi-Key
FB2 FB3 FB4 FB5: library part "FB0603 1kOhm", Supplier Part Number 1=490-1015-1-ND, Impedance at 100MHz=1kOhms, Supplier 1=Digi-Key
H1 H2 H3 H4 H5 H6: library part "1/8in by 1/4in Fastner Hole"
J1 J2 J4: library part "2POS 4.2mm Pitch Right Angle", "TE 1586043-2 - 2position 4.2mm pitch right angle with screw support", Supplier Part Number 1=A30626-ND, Positions=2, Supplier 1=Digi-Key
J3: library part "RJ45 Unshielded PTH Connector", "Amphenol RJ45 Unshielded Through-Hole Connector", Supplier Part Number 1=609-5081-ND, Supplier 1=Digi-Key
J5 J6: library part CMP-0029-00003-1, "Ultra Small Surface Mount Coaxial Connector, 50 Ohm, -40 to 90 degC, 3-Pin SMD, RoHS, Tape and Reel", Colour=Black, Current Rating="3 A", Max Operating Temperature=105degC, Min Operating Temperature=-65degC, Package Quantity=50, ComponentLink1Description="Manufacturer URL", ComponentLink1URL=https://www.hirose.com, ComponentLink2Description=Datasheet, ComponentLink2URL=https://www.hirose.com/product/en/download_file/key_name/U.FL/category/Catalog/doc_file_id/31697/?file_category_id=4&item_id=15&is_series=1, Contact Finish=Lead, Contact Material=Bronze, Contact Plating=Tin, DatasheetVersion=Aug-16, Height="8.13 mm", Lead Pitch="2.54 mm", Length="101.19 mm", Mount="Through Hole", PackageDescription="3-Pin Surface Mount Device, Body 2.6 x 2.6 mm", PackageReference=U.FL-R-SMT, Packaging=Bulk, Pins=80, Radiation Hardening=No, RoHSCompliant=True, Width="4.88 mm"
J7: library part "31 Position Flat Flex ZIF Connector", "TE 3-1734839-1 31 Position Flat Flex ZIF Connector", Supplier Part Number 1=A101346CT-ND, Positions=31, Supplier 1=Digi-Key
L1: library part "IND0603 27nH 400mA 5% 650mOhm 1.7GHz", "SMT 0603 Ceramic Inductor", Current Rating=300mA, DC Resistance=450mOhm, Supplier Part Number 1=732-6268-1-ND, Tolerance=5%, Self Resonant=1.7GHz, Supplier 1=Digi-Key
L2: library part "INDWW 10uH 1.45A 20% 144mOhm 24MHz", "SMT Wire Wound Inductor", Current Rating=1.45A, DC Resistance=144mOhm, Supplier Part Number 1=587-2409-1-ND, Tolerance=20%, Self Resonant=24MHz, Supplier 1=Digi-Key, Supplier 2=Mouser, Supplier Part Number 2=963-NRS5020T100MMGJ
P1: library part "Raspberry Pi Zero Mate", "The header and mechanical drawings for connnecting a Raspbery Pi Zero"
P2: library part "0.1\" 2 row 24 position female right-angle header sullins", "Sullins 0.1\" 2 row 24 position female right-angle header", Supplier Part Number 1=S5526-ND, Pitch=2.54mm, Positions=24, Rows=2, Supplier 1=Digi-Key, Supplier 2=Digi-Key, Supplier Part Number 2=S5565-ND
P3: library part "MicroUSB TypeB", "Micro USB Type B Port", Supplier Part Number 1=609-4613-1-ND, Datasheet=http://portal.fciconnect.com/Comergent//fci/drawing/10118192.pdf, Supplier=http://www.digikey.com/product-detail/en/amphenol-fci/10118192-0001LF/609-4613-2-ND/2785387, Supplier 1=Digi-Key
Q1: library part MBT3904DW1T1G, "3904 Dual NPN Transistor", Supplier Part Number 1=MBT3904DW1T1GOSCT-ND, Supplier 1=Digi-Key, Supplier 2=Mouser, Supplier Part Number 2=863-SMBT3904DW1T1G
R1 R2 R3 R11 R12 R36 R37 R38 R39: library part "RES0603 10K 1% 1/10W", "SMT 0603 Ceramic Resistor", Power=1/10W, Supplier Part Number 1=311-10.0KHRCT-ND, Tolerance=1%, Supplier 1=Digi-Key, Supplier 2=Digi-Key, Supplier 3=Digi-Key, Supplier Part Number 2=RMCF0603FT10K0CT-ND, Supplier Part Number 3=P10.0KHCT-ND
R4 R5 R33: library part "RES0603 4.7K 1% 1/10W", "SMT 0603 Ceramic Resistor", Power=1/10W, Supplier Part Number 1=311-4.70KHRCT-ND, Tolerance=1%, Supplier 1=Digi-Key, Supplier 2=Digi-Key, Supplier 3=Digi-Key, Supplier Part Number 2=P4.70KHCT-ND, Supplier Part Number 3=RMCF0603FT4K70CT-ND
R6 R28: library part "RES0603 10 1% 1/10W", "SMT 0603 Ceramic Resistor", Power=1/10W, Supplier Part Number 1=311-10.0HRCT-ND, Tolerance=1%, Supplier 1=Digi-Key, Supplier 2=Digi-Key, Supplier 3=Digi-Key, Supplier Part Number 2=RMCF0603FT10R0CT-ND, Supplier Part Number 3=CR0603-FX-10R0ELFCT-ND
R7: library part "RES0603 3M 1% 1/10W", "SMT 0603 Ceramic Resistor", Power=1/10W, Supplier Part Number 1=541-3.00MHCT-ND, Tolerance=1%, Supplier 1=Digi-Key, Supplier 2=Digi-Key, Supplier 3=Digi-Key, Supplier Part Number 2=RMCF0603FT3M00CT-ND, Supplier Part Number 3=1276-4958-1-ND
R8: library part "RES0603 33 1% 1/10W", "SMT 0603 Ceramic Resistor", Power=1/10W, Supplier Part Number 1=311-33.0HRCT-ND, Tolerance=1%, Supplier 1=Digi-Key, Supplier 2=Digi-Key, Supplier 3=Digi-Key, Supplier Part Number 2=RMCF0603FT33R0CT-ND, Supplier Part Number 3=P33.0HCT-ND
R9 R10 R27: library part "RES0603 1K 1% 1/10W", "SMT 0603 Ceramic Resistor", Power=1/10W, Supplier Part Number 1=311-1.00KHRCT-ND, Tolerance=1%, Supplier 1=Digi-Key, Supplier 2=Digi-Key, Supplier 3=Digi-Key, Supplier Part Number 2=P1.00KHCT-ND, Supplier Part Number 3=RMCF0603FG1K00CT-ND
R13: library part "RES0603 2.43K 1% 1/10W", "SMT 0603 Ceramic Resistor", Power=1/10W, Supplier Part Number 1=311-2.43KHRDKR-ND, Tolerance=1%, Supplier 1=Digi-Key, Supplier 2=Mouser, Supplier Part Number 2=603-RC0603FR-072K43L
R14: library part "RES0603 4.32K 1% 1/10W", "SMT 0603 Ceramic Resistor", Power=1/10W, Supplier Part Number 1=311-4.32KHRTR-ND, Tolerance=1%, Supplier 1=Digi-Key, Supplier 2=Digi-Key, Supplier 3=Digi-Key, Supplier Part Number 2=P4.32KHCT-ND, Supplier Part Number 3=CRCW06034K32FKEB-ND
R15: library part "RES0603 2.2K 1% 1/10W", "SMT 0603 Ceramic Resistor", Power=1/10W, Supplier Part Number 1=311-2.20KHRCT-ND, Tolerance=1%, Supplier 1=Digi-Key
R16: library part "RES0603 1.5K 1% 1/10W", "SMT 0603 Ceramic Resistor", Power=1/10W, Supplier Part Number 1=311-1.50KHRCT-ND, Tolerance=1%, Supplier 1=Digi-Key, Supplier 2=Digi-Key, Supplier Part Number 2=RMCF0603FT1K50CT-ND
R17 R18 R19: library part "RES0603 100K 1% 1/10W", "SMT 0603 Ceramic Resistor", Power=1/10W, Supplier Part Number 1=311-100KHRCT-ND, Tolerance=1%, Supplier 1=Digi-Key
R20: library part "RES0603 43 1% 1/10W", "SMT 0603 Ceramic Resistor", Power=1/10W, Supplier Part Number 1=311-43.0HRCT-ND, Tolerance=1%, Supplier 1=Digi-Key, Supplier 2=Digi-Key, Supplier Part Number 2=P43.0HCT-ND
R21: library part "RES0603 91 1% 1/10W", "SMT 0603 Ceramic Resistor", Power=1/10W, Supplier Part Number 1=311-91.0HRCT-ND, Tolerance=1%, Supplier 1=Digi-Key, Supplier 2=Digi-Key, Supplier 3=Digi-Key, Supplier Part Number 2=541-91.0HCT-ND, Supplier Part Number 3=RHM91CFCT-ND
R22: library part "RES0603 13.3K 1% 1/10W", "SMT 0603 Ceramic Resistor", Power=1/10W, Supplier Part Number 1=311-13.3KHRCT-ND, Tolerance=1%, Supplier 1=Digi-Key, Supplier 2=Digi-Key, Supplier Part Number 2=P13.3KHCT-ND
R23 R24: library part "RES0603 28K 0.1% 1/10W", "SMT 0603 Ceramic Resistor", Power=1/10W, Supplier Part Number 1=YAG4680CT-ND, Tolerance=0.1%, Supplier 1=Digi-Key, Supplier 2=Digi-Key, Supplier Part Number 2=P28KDBCT-ND
R25 R26: library part "RES0603 12K 1% 1/10W", "SMT 0603 Ceramic Resistor", Power=1/10W, Supplier Part Number 1=311-12.0KHRCT-ND, Tolerance=1%, Supplier 1=Digi-Key, Supplier 2=Digi-Key, Supplier Part Number 2=RMCF0603FT12K0CT-ND
R29 R30 R31: library part "RESARR1206 100 5% 1/16W", Power=1/16W, Supplier Part Number 1=YC164J-100CT-ND, Tolerance=5%, Supplier 1=Digi-Key
R32: library part "RES0603 910K 1% 1/10W", "SMT 0603 Ceramic Resistor", Power=1/10W, Supplier Part Number 1=311-910KHRCT-ND, Tolerance=1%, Supplier 1=Digi-Key, Supplier 2=Digi-Key, Supplier 3=Digi-Key, Supplier Part Number 2=P910KHCT-ND, Supplier Part Number 3=RMCF0603FT910KCT-ND
R34: library part "RES0603 205K 1% 1/10W", "SMT 0603 Ceramic Resistor", Power=1/10W, Supplier Part Number 1=311-205KHRCT-ND, Tolerance=1%, Supplier 1=Digi-Key, Supplier 2=Digi-Key, Supplier 3=Digi-Key, Supplier Part Number 2=P205KHCT-ND, Supplier Part Number 3=541-205KHCT-ND
R35: library part "RES0603 23.2K 1% 1/10W", "SMT 0603 Ceramic Resistor", Power=1/10W, Supplier Part Number 1=311-23.2KHRCT-ND, Tolerance=1%, Supplier 1=Digi-Key, Supplier 2=Digi-Key, Supplier 3=Digi-Key, Supplier Part Number 2=541-23.2KHCT-ND, Supplier Part Number 3=RMCF0603FG23K2CT-ND
S1 S2 S3 S4: library part "TE 3-1825910-1 17mm Tactile Switch", "TE 3-1825910-1 17mm Tactile Switch", Supplier Part Number 1=450-1643-ND, Supplier 1=Digi-Key
TP1 TP2 TP3 TP4: library part TestPoint1, "Small 0.762mm Round Test Point"
U1: library part MCP23017T-E/SO, "Microchip MCP23017 I2C 16CH IO Expander", Supplier Part Number 1=MCP23017T-E/SOCT-ND, Supplier 1=Digi-Key
U2: library part NC7S32M5X, "Fairchild/ON Semi NC7S32M5X Single OR Gate", Supplier Part Number 1=NC7S32M5XCT-ND, Supplier 1=Digi-Key
U3: library part LMV793MF/NOPB, "TI LMV793MF/NOPB 88MHz Single OP-Amp", Supplier Part Number 1=LMV793MF/NOPBCT-ND, Bandwidth=88MHz, Slew Rate="35 V/us", Supplier 1=Digi-Key
U4: library part SN65176B, "Half Duplex RS485 Tranceiver", Supplier Part Number 1=296-14636-1-ND, Supplier 1=Digi-Key, Supplier 2=Mouser, Supplier Part Number 2=595-SN65176BDR
U5: "AP2114 3.3V Fixed LDO Regulator", Supplier Part Number 1=AP2114H-3.3TRG1DICT-ND, Supplier 1=Digi-Key
U6: library part LM324DR2G, "ON Semi LM324DR2G 1MHz Quad OP-Amp", Supplier Part Number 1=LM324DR2GOSCT-ND, Supplier 1=Digi-Key
U7: "USB UART Asynchronous Serial Data Transfer Chip, 32-pin QFN, Tape and Reel", Manufacturer=FTDI, ComponentLink1Description="Manufacturer URL", ComponentLink1URL=http://www.ftdichip.com/, ComponentLink2Description=Datasheet, ComponentLink2URL=http://www.ftdichip.com/Support/Documents/DataSheets/ICs/DS_FT232R.pdf, DatasheetVersion="ver 2.10, Mar-2012", PackageDescription="32-Pin Quad Flat No-Lead 0.5 mm Pitch, Pullback, 3.2 x 3.2 mm Exposed Pad", PackageReference=PQFN5X5-32, PackageVersion=Mar-12, PartNumber=FT232RQ-Reel
U8: library part NEO, "u-blox NEO GNSS module", Manufacturer=u-blox, Part Description="u-blox GNSS module"
U9: library part FAN5331, "ON Semi FAN5531 Boost Converter", Supplier Part Number 1=FAN5331SXCT-ND, Supplier 1=Digi-Key, Supplier 2=Mouser, Supplier Part Number 2=512-FAN5331SX
X1: library part CMP-0463-00001-2, "Crystal, 32.768 KHz, -40 to 85 degC, 3.2 x 1.5 x 0.9 mm SMD", Frequency Tolerance="+/-20 ppm", Load Capacitance="12.5 pF", Manufacturer=ITTI, Nominal Frequency=32.768KHz, Operating Temperature="-40 to 85 degC", ComponentLink1Description="Manufacturer URL", ComponentLink1URL=http://www.itti-co.com, Drive Level="1 max. uw", Mounting Technology="Surface Mount", PackageDescription="2-Pin Hand Drawn, Body 3.2 x 1.5mm, Pitch 2.5 mm", PackageReference=14340272-32.768KHz-2, PartNumber=14340272-32.768KHz

## Via types
v1: diameter 0.889, hole 0.508, Top Layer to Bottom Layer, tented top, 9 vias
v2: diameter 1.27, hole 0.711, Top Layer to Bottom Layer, 4 vias

## Nets (pads, with @x,y where several pads share a name; then routed paths per layer and width w, separated by ;. In a path a pad name is that pad's centre, name@x,y a point inside that pad or via, vN(x,y) a via of type N, cw(c..) or ccw(c..) an arc to the next point about the centre after c; other vN are vias at no path point)
5V: C7.2 C10.2 JP1.3 P1.2 P1.4 P2.1 U4.8 U5.3 | length 1.5
  Top Layer w0.254: U4.8 23.673,31.833 23.691,31.852 24.774,31.852 C7.2
60Hz: A1.10 P1.22 U6.7
60HzAnt: A2.1 C12.2 P2.21
BS1: A1.2 A3.13 C1.2 C4.2 C5.2 C6.2 C11.2 C15.2 C20.2 C22.2 C24.2 C26.2 J7.11 J7.12 JP1.1 L2.1 P2.2 R1.2 R2.2 R4.2 R5.2 R6.2 R9.2 R11.2 R18.2 R27.2 R33.2 R36.2 R37.2 R38.2 R39.2 U1.9 U2.5 U3.5 U5.2 U5.4 U6.4 U8.22 U8.23 U9.4 U9.5 | length 28.2
  Top Layer w0.254: R27.2 -22.792,37.94 -22.25,38.481 -22.25,45.593 -23.012,46.355 -24.13,46.355 -24.841,47.066 -24.841,52.388 U8.22@-23.546,52.388 ; U8.22 U8.22@-23.546,52.388 ; C20.2 U8.23 -23.546,53.488 U8.22@-23.546,52.388
BS2: A1.0 A1.1 A1.15 A1.38 A3.1 A3.8 A3.10 C1.1 C2.1 C3.1 C4.1 C5.1 C6.1 C7.1 C10.1 C11.1 C15.1 C16.1 C17.1 C18.1 C20.1 C21.1 C22.1 C23.1 C24.1 C25.1 C26.1 C29.1 J3.4 J3.5 J4.1 J5.1 J5.2 J6.1 J6.2 J7.1 J7.2 J7.13 J7.15 J7.17 J7.18 J7.19 J7.23 J7.24 J7.25 J7.26 J7.27 J7.31 JP3.1 JP4.1 P1.6 P1.9 P1.14 P1.20 P1.25 P1.30 P1.34 P1.39 P2.23 P2.24 P3.5 R3.1 R7.1 R10.1 R12.1 R14.1 R19.1 R32.2 R35.1 S1.3 S1.4 S2.1 S2.2 S3.3 S3.4 S4.3 S4.4 U1.10 U1.15 U1.16 U1.17 U2.3 U3.2 U4.5 U5.1 U6.11 U6.12 U7.4 U7.17 U7.20 U7.24 U7.26 U7.33 U8.7 U8.10 U8.12 U8.13 U8.24 U9.2 | length 47.1
  Top Layer w0.254: J5.1 -43.332,40.213 -43.332,43.163 J5.2 -42.748,43.163 -42.748,44.069 -41.429,45.388 C21.1 -40.119,46.73 -38.862,47.988 U8.7 -34.29,47.988 -33.503,47.2 -33.503,43.561 -34.276,42.788 U8.10 -36.525,42.788 -36.525,40.588 U8.12 -33.504,40.588 -33.503,40.589 -24.03,40.589 -24.028,40.588 U8.13 ; U8.24 -21.92,54.588 -21.62,54.888 C20.1 ; U4.5 24.203,28.023 26.024,29.845 C7.1
  other v1: 31.768,48.846 32.768,48.846 33.768,48.846 31.768,49.846 32.768,49.846 33.768,49.846 31.768,50.846 32.768,50.846 33.768,50.846
BTN1: R36.1 S1.1 S1.2 U1.21
BTN2: R37.1 S3.1 S3.2 U1.22
BTN3: R38.1 S4.1 S4.2 U1.23
BTN4: R39.1 S2.3 S2.4 U1.24
C\S\: A1.29 FB2.1
CT: A1.4 J2.2 P2.3 R8.2
CT_N: C29.2 J2.1 P2.5 R8.1 R9.1 R10.2
D0: A1.7 J7.20 P1.5 P2.6 R5.1 U1.12
D1: A1.6 J7.21 J7.22 P1.3 P2.4 R4.1 U1.13
D_SEL: JP4.2 U8.2
DIO0: R30.2 U1.3
DIO1: R30.3 U1.4
DIO2: R30.4 U1.5
DIO3: R31.3 U1.6
DIO4: R31.4 U1.7
DIO5: R31.2 U1.8
FTDI_3.3V: C18.2 U7.1 U7.16
FTDI_DTR: Q1.6 R25.2 U7.31
FTDI_RTS: Q1.4 R26.2 U7.32
FTDI_RX: A1.35 P1.10 TP4.1 U7.2
FTDI_TX: A1.34 P1.8 TP3.1 U7.30
GPIO1: A1.14 P2.8
GPIO2: A1.16 P2.10
GPIO3: A1.13 P2.12
GPIO4: A1.23 P2.14
GPIO5: P2.16 U1.25
GPIO6: P2.18 U1.26
GPIO7: P2.20 U1.27
GPIO8: P2.22 U1.28
GPS_PPS: A1.11 P1.32 U8.3
IO0: A1.25 P1.16 Q1.1 R1.1 TP1.1
IOE_INT: A1.26 U2.4
IOE_R\S\T\: A1.24 R3.2 U1.18
Iref: J7.28 R32.1
LCD_R\S\T\: J7.16 R33.1 U1.2
Leak: A1.5 J1.1 P2.13 R7.2
Leak_P: J1.2 P2.11 R6.1
LoRa_R\S\T\: R29.4 U1.1
MCU_EN: A1.3 P1.18 Q1.3 R2.1 TP2.1
Mic: A1.12 JP2.2
Mic_In: C8.1 J4.2 JP2.1 P2.15 R15.1
MISO: A1.31 FB4.1 R30.1
MOSI: A1.37 FB5.1 R29.1
NetA1_8: A1.8 C2.2 X1.1
NetA1_9: A1.9 C3.2 X1.2
NetA3_2: A3.2 R30.8
NetA3_3: A3.3 R29.8
NetA3_4: A3.4 R29.7
NetA3_5: A3.5 R29.6
NetA3_6: A3.6 R29.5
NetA3_7: A3.7 R31.7
NetA3_9: A3.9 J6.3
NetA3_11: A3.11 R31.6
NetA3_12: A3.12 R31.5
NetA3_14: A3.14 R30.7
NetA3_15: A3.15 R30.6
NetA3_16: A3.16 R30.5
NetC8_2: C8.2 R16.1
NetC9_1: C9.1 R16.2 R17.1 U3.4
NetC9_2: C9.2 JP2.3 R17.2 U3.1
NetC12_1: C12.1 R22.1
NetC13_1: C13.1 R23.2 U6.2
NetC13_2: C13.2 C14.2 R21.1 R22.2
NetC14_1: C14.1 R24.1 U6.1 U6.5
NetC16_2: C16.2 FB1.1 P3.1
NetC19_2: C19.2 J5.3 L1.2 | length 3.2
  Top Layer w0.254: J5.3 L1.2 -40.005,41.688 -39.986,41.707 -38.626,41.707 C19.2
NetC21_2: C21.2 L1.1 R28.2 | length 2.7
  Top Layer w0.254: L1.1 -40.132,43.018 -40.132,44.138 C21.2 -39.595,44.138 -39.345,43.888 R28.2
NetC27_1: C27.1 C28.1 R34.1 R35.2 U9.3
NetD1_1: D1.1 L2.2 U9.1
NetFB2_2: FB2.2 U8.18 | length 2.8
  Top Layer w0.254: U8.18 -22.154,47.988 -21.946,47.779 FB2.2
NetFB3_2: FB3.2 U8.19 | length 2.7
  Top Layer w0.254: U8.19 -21.993,49.088 -21.946,49.04 FB3.2
NetFB4_2: FB4.2 U8.20 | length 2.7
  Top Layer w0.254: U8.20 -22.058,50.188 -21.946,50.3 FB4.2
NetFB5_2: FB5.2 U8.21 | length 2.8
  Top Layer w0.254: U8.21 -22.222,51.288 -21.946,51.565 FB5.2
NetJP1_2: JP1.2 R15.2
NetQ1_2: Q1.2 R26.1
NetQ1_5: Q1.5 R25.1
NetR11_1: R11.1 R12.2 U3.3
NetR13_2: R13.2 U4.1 | length 3.2
  Top Layer w0.254: R13.2 15.747,32.385 16.299,31.833 U4.1
NetR18_1: R18.1 R19.2 U6.10
NetR20_1: R20.1 U6.3 U6.6 U6.8 U6.9
NetR20_2: R20.2 R21.2
NetR23_1: R23.1 R24.2
NetU1_19: U1.19 U2.2
NetU1_20: U1.20 U2.1
NetU6_13: U6.13 U6.14
R\S\T\: R27.1 U8.8 | length 16.2
  Top Layer w0.254: v2(-35.23,46.482) -35.23,44.988 U8.8 ; v2(-33.934,38.024) -30.512,38.024 R27.1
  Bottom Layer w0.254: v2(-35.23,46.482) -37.846,43.866 -37.846,41.935 v2(-33.934,38.024)
RF_IN: C19.1 U8.11 | length 14
  Top Layer w0.254: v2(-38.811,39.624) -37.821,40.615 -37.821,41.688 C19.1 ; U8.11 -33.115,41.688 v2(-32.258,42.545)
  Bottom Layer w0.254: v2(-38.811,39.624) -35.89,42.545 v2(-32.258,42.545)
RFU1: P2.17
RFU2: P2.19
RS485.D: A1.28 U4.4
RS485.DE: A1.36 U4.2 U4.3 | length 1.3
  Top Layer w0.254: U4.3 18.059,29.293 18.059,30.563 U4.2
RS485.R: A1.27 R13.1 R14.2 | length 1.2
  Top Layer w0.254: R13.1 15.723,34.236 15.723,35.399 R14.2
RS4855_A: J3.8 P2.9 U4.6
RS4855_B: J3.7 P2.7 U4.7
SAFEBOOT_N: JP3.2 U8.1 | length 5
  Top Layer w0.254: JP3.2 -39.462,55.645 -38.405,54.588 U8.1
SCK: A1.30 FB3.1 R29.2
SPI_C\S\1\: A1.33 R29.3
USB_5V: C17.2 FB1.2 U7.19
USB_D_N: P3.2 U7.15
USB_D_P: P3.3 U7.14
VCC: C23.2 C27.2 C28.2 D1.3 J7.30 R34.2
VCC_RF: R28.1 U8.9 | length 2.2
  Top Layer w0.254: R28.1 -37.376,43.891 -35.716,43.891 -35.712,43.888 U8.9
Vcomh: C25.2 J7.29
pads on no net: A1.17 A1.18 A1.19 A1.20 A1.21 A1.22 A1.32 D1.2 H1.1 H2.1 H3.1 H4.1 H5.1 H6.1 J1.0 J2.0 J3.0 J3.1 J3.2 J3.3 J3.6 J4.0 J7.0 J7.3 J7.4 J7.5 J7.6 J7.7 J7.8 J7.9 J7.10 J7.14 P1.0 P1.1 P1.7 P1.11 P1.12 P1.13 P1.15 P1.17 P1.19 P1.21 P1.23 P1.24 P1.26 P1.27 P1.28 P1.29 P1.31 P1.33 P1.35 P1.36 P1.37 P1.38 P1.40 P3.0 P3.4 R31.1 R31.8 U1.11 U1.14 U7.3 U7.5 U7.6 U7.7 U7.8 U7.9 U7.10 U7.11 U7.12 U7.13 U7.18 U7.21 U7.22 U7.23 U7.25 U7.27 U7.28 U7.29 U8.4 U8.5 U8.6 U8.14 U8.15 U8.16 U8.17

## Text inside footprints (layer, text, board x,y; h text height)
J3: Top Overlay "RJ45" at 26.519,-63.744 h2
P1: Mechanical 1 "SD Card" at -36.584,-54.935 h1.5; Mechanical 1 "HDMI" at -15.063,-46.716 h2 r90; Mechanical 1 "USB" at -15.042,-16.177 h1.5 r90; Mechanical 1 "USB" at -14.965,-3.42 h1.5 r90
P2: Mechanical 1 "11.37MM / FROM / CENTER" at 2.235,-65.028 h1 r90